# EAGLE board ESP32 alcohol dispenser board (EAGLE 9.6.2)
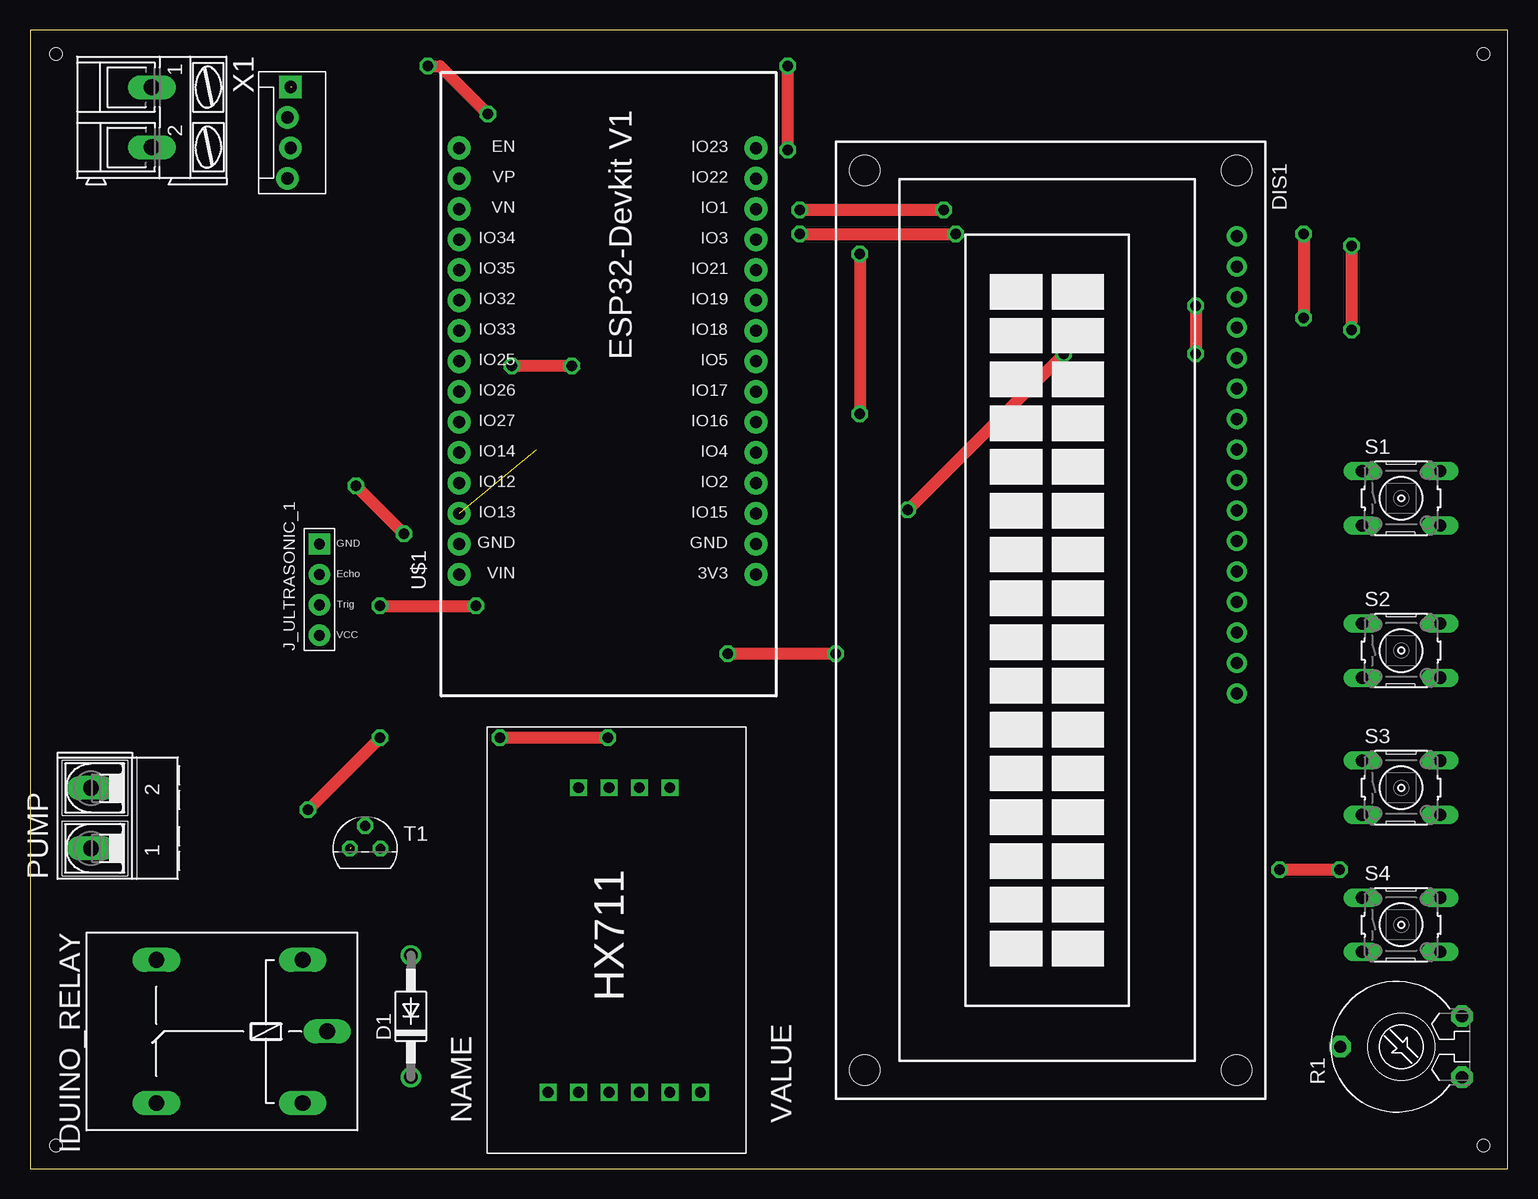
[diagram p0: board, top side]
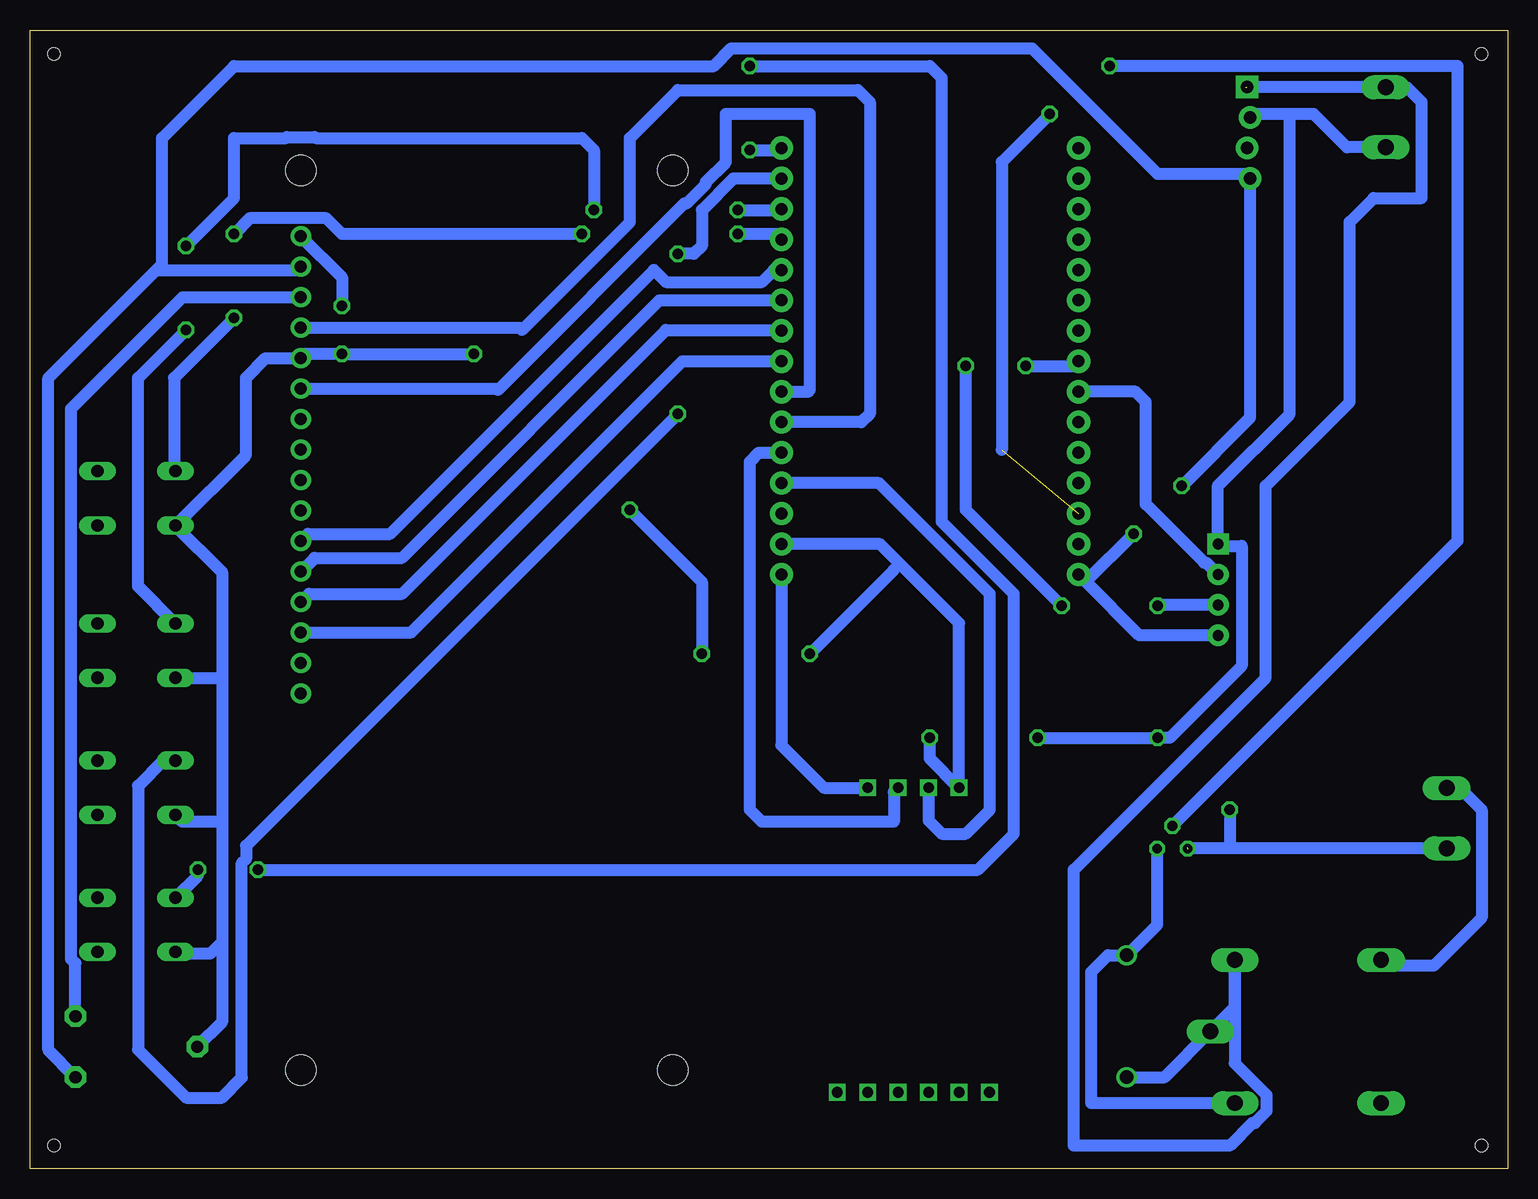
[diagram p1: board, bottom side, seen from below]

Size 123.17 x 94.92 mm. Coordinates in mm from the lower left corner, seen from the top.
Outline: 0,0 123.17,0 123.17,94.92 0,94.92 0,0
Copper layers (1*16): Top 0.035mm / dielectric 1.5mm / Bottom 0.035mm
Design rules "default": minimum track width 6mil, minimum drill 0.35mm, track to track 6mil, track to pad 6mil, pad to pad 6mil, via to via 6mil, smd to smd 6mil, copper to edge 40mil, drill to drill 6mil, minimum pad ring 10mil, minimum via ring 8mil, stop-mask expansion 4mil, vias tented up to drill 0mil, thermal gap 10mil
Holes 1 mm at 2.17,92.92 121.17,92.92 121.17,1.92 2.17,1.92

## Footprints (pad centres in the part's own frame; a part is rotated, then mirrored left to right if it is on the bottom)
DO41-10 = drill 1.118: A 5.08,0; C -5.08,0
TUXGR_16X2_R2 = drill 1 pad 1.676: 1 -32,15.5; 2 -29.46,15.5; 3 -26.92,15.5; 4 -24.38,15.5; 5 -21.84,15.5; 6 -19.3,15.5; 7 -16.76,15.5; 8 -14.22,15.5; 9 -11.68,15.5; 10 -9.14,15.5; 11 -6.6,15.5; 12 -4.06,15.5; 13 -1.52,15.5; 14 1.02,15.5; 15 3.56,15.5; 16 6.1,15.5 | hole 2.5: -37.5,-15.5; 37.5,-15.5; -37.5,15.5; 37.5,15.5
G5LE = drill 1.321 long: 1 -7.493,-5.969; 2 -7.493,5.969; O 4.699,5.969; P -9.525,0; S 4.699,-5.969
HC-SR04_FOOTPRINT = drill 0.9 pad 1.778: ECHO 0,1.27; TRIG 0,-1.27; VCC 0,-3.81 | drill 0.9 pad 1.778 square: GND 0,3.81
MOLEX-1X4_LOCK = drill 1.016 pad 1.88 square: 1 0,0.127 | drill 1.016 pad 1.88: 2 2.54,-0.127; 3 5.08,0.127; 4 7.62,-0.127
AK500/2-H = drill 1.321 long: 1 -2.515,0; 2 2.515,0
PT-10 = drill 1.016 pad 1.778 octagon: 1 -2.54,-5.08; 2 2.54,-5.08; 3 0,5.08
B3F-10XX = drill 1.016 long: 1 -3.251,2.261; 2 3.251,2.261; 3 -3.251,-2.261; 4 3.251,-2.261
TO92 = drill 0.813 octagon: 1 1.27,0; 2 0,1.905; 3 -1.27,0
ESP32-DEVKITV1 = drill 1 pad 1.93: 1 -22.87,-13.54; 2 -20.33,-13.54; 3 -17.79,-13.54; 4 -15.25,-13.54; 5 -12.71,-13.54; 6 -10.17,-13.54; 7 -7.63,-13.54; 8 -5.09,-13.54; 9 -2.55,-13.54; 10 -0.01,-13.54; 11 2.53,-13.54; 12 5.07,-13.54; 13 7.61,-13.54; 14 10.15,-13.54; 15 12.69,-13.54; 16 12.69,11.23; 17 10.15,11.23; 18 7.61,11.23; 19 5.07,11.23; 20 2.53,11.23; 21 -0.01,11.23; 22 -2.55,11.23; 23 -5.09,11.23; 24 -7.63,11.23; 25 -10.17,11.23; 26 -12.71,11.23; 27 -15.25,11.23; 28 -17.79,11.23; 29 -20.33,11.23; 30 -22.87,11.23
HX711 = drill 0.9 square: A+ 8.89,21.59; A- 8.89,24.13; B+ 8.89,16.51; B- 8.89,19.05; DT 34.29,24.13; E+ 8.89,29.21; E- 8.89,26.67; GND 34.29,26.67; SCK 34.29,21.59; VCC 34.29,19.05
AK300/2 = drill 1.321 long: 1 -2.515,0; 2 2.489,0

## Placement (x,y rotation side)
D1  1N4004  [DO41-10]  31.75,12.7 90 top
DIS1  TUXGR_16X2_R2  [TUXGR_16X2_R2]  85.09,45.72 270 top
IDUINO_RELAY  G5LE  [G5LE]  15.24,11.43 180 top
J_ULTRASONIC_1  HC-SR04  [HC-SR04_FOOTPRINT]  24.13,48.26 0 top
LM25965  LM2596S_MODULE  [MOLEX-1X4_LOCK]  21.59,90.17 270 top
PUMP  12V  [AK500/2-H]  5.08,29.21 90 top
R1  [PT-10]  114.3,10.16 90 top
S1  [B3F-10XX]  114.3,55.88 0 top
S2  [B3F-10XX]  114.3,43.18 0 top
S3  [B3F-10XX]  114.3,31.75 0 top
S4  [B3F-10XX]  114.3,20.32 0 top
T1  2N4416  [TO92]  27.94,26.67 0 top
U$1  ESP32DEVKITV1  [ESP32-DEVKITV1]  46.99,72.39 90 top
U$3  [HX711]  72.39,-2.54 90 top
X1  [AK300/2]  10.16,87.63 270 top

## Library data of the parts
D1 = diode
DIS1 = display-lcd; OC_FARNELL: unknown; OC_NEWARK: unknown
IDUINO_RELAY = relay; OC_FARNELL: unknown; OC_NEWARK: unknown
J_ULTRASONIC_1 = Ultrasonic Sensor HC-SR04
LM25965 = LM2596S_Module
PUMP X1 = con-ptr500; OC_FARNELL: unknown; OC_NEWARK: unknown
R1 = rcl; SPICEMODEL: POT; SPICEPREFIX: X
S1-S4 = switch-omron; MPN: B3F-1000; OC_FARNELL: 176432; OC_NEWARK: 36M3542
T1 = transistor-neu-to92
U$1 = ESP32-DEVKITV1
U$3 = HX711

## Nets
GND: DIS1.1 DIS1.5 J_ULTRASONIC_1.GND LM25965.2 PUMP.1 R1.3 S1.3 S2.3 S3.3 S4.3 T1.3 U$1.2 U$3.GND X1.2
N$1: DIS1.6 U$1.7
N$2: T1.2 U$1.28
N$3: U$1.1 U$3.VCC
N$4: U$1.4 U$3.DT
N$5: U$1.5 U$3.SCK
N$6: J_ULTRASONIC_1.ECHO U$1.24
N$7: J_ULTRASONIC_1.TRIG U$1.23
N$8: S4.1 U$1.15
N$9: S3.1 U$1.14
N$10: S2.1 U$1.13
N$11: S1.1 U$1.12
N$12: D1.A IDUINO_RELAY.2 T1.1
N$13: DIS1.11 U$1.11
N$14: DIS1.12 U$1.10
N$15: DIS1.13 U$1.9
N$16: DIS1.14 U$1.8
N$17: DIS1.2 J_ULTRASONIC_1.VCC LM25965.4 R1.1 U$1.30
N$18: DIS1.4 U$1.6
N$19: D1.C IDUINO_RELAY.1 IDUINO_RELAY.P LM25965.1 X1.1
N$20: DIS1.3 R1.2
PUMP_12V: IDUINO_RELAY.S PUMP.2

## Tracks (layer width: path | path; a pad name or v marks a point on that pad's centre or on a via)
GND  (via drill 0.9 pad 1.3)  (1 unrouted)
  Top 0.152: 29.01,36.37 v29.17,35.92
  Top 1.016: v97.17,71.92 v97.17,67.92 | v86.17,67.92 v73.17,54.92 | v67.17,42.92 v58.17,42.92 | v48.17,35.92 v39.17,35.92 | v29.17,35.92 v23.17,29.92
  Bottom 0.152: 26.72,26.77 26.65,26.7 | 50.49,50.24 50.8,49.94 51.17,49.92
  Bottom 1.016: X1.2 13.39,85.14 16.17,87.92 18.17,87.92 | 18.17,87.92 21.17,87.92 LM25965.2 | 18.17,87.92 18.17,62.92 24.13,56.96 J_ULTRASONIC_1.GND 23.98,51.92 22.17,51.92 22.17,41.92 28.17,35.92 v29.17,35.92 v39.17,35.92 | PUMP.1 23.17,26.7 | 23.17,26.7 26.65,26.7 | U$1.2 52.31,52.06 50.49,50.24 45.72,45.47 U$3.GND 48.17,34.2 v48.17,35.92 | DIS1.1 97.17,74.3 v97.17,71.92 | 107.17,40.92 107.17,49.74 S1.3 105.17,59.5 105.17,65.92 103.53,67.56 DIS1.5 100.23,67.92 v97.17,67.92 v86.17,67.92 | S2.3 107.17,40.92 | 107.17,40.92 107.17,28.92 | 107.17,28.92 110.48,28.92 S3.3 | 107.17,28.92 107.17,18.92 | 107.17,18.92 108.17,17.92 110.91,17.92 S4.3 | 107.17,18.92 107.17,12.21 R1.3 | v73.17,54.92 67.17,48.92 v67.17,42.92 | v58.17,42.92 51.17,49.92 | v23.17,29.92 23.17,26.7
  other vias: 100.59,67.56
N$1
  Bottom 1.016: DIS1.6 84.27,65.02 84.17,64.92 68.64,80.45 68.44,80.45 66.82,82.07 66.82,82.27 65.17,83.92 65.17,87.92 58.17,87.92 58.17,64.92 58.33,64.76 U$1.7
N$2  (via drill 0.9 pad 1.3)  (1 unrouted)
  Top 1.016: v33.17,91.92 34.17,91.92 v38.17,87.92
  Bottom 1.016: T1.2 4.17,52.34 4.17,91.92 v33.17,91.92 | v38.17,87.92 42.17,83.92 42.17,59.92
N$3
  Bottom 1.016: U$1.1 60.53,35.28 57,31.75 U$3.VCC
N$4
  Bottom 1.016: U$3.DT 48.26,29.01 47.17,27.92 45.17,27.92 43.17,29.92 43.17,47.92 52.39,57.14 U$1.4
N$5
  Bottom 1.016: U$3.SCK 51.17,31.38 51.17,28.92 62.17,28.92 63.17,29.92 63.17,58.92 62.41,59.68 U$1.5
N$6
  Bottom 1.016: J_ULTRASONIC_1.ECHO 25.12,50.52 25.29,50.52 30.17,55.4 30.17,63.92 31.01,64.76 U$1.24
N$7  (via drill 0.9 pad 1.3)
  Top 1.016: v29.17,46.92 v37.17,46.92 | v45.17,66.92 v40.17,66.92
  Bottom 1.016: J_ULTRASONIC_1.TRIG 29.1,46.99 v29.17,46.92 | v37.17,46.92 45.17,54.92 v45.17,66.92 | v40.17,66.92 36.14,66.92 U$1.23
N$8  (via drill 0.9 pad 1.3)
  Top 1.016: v109.17,24.92 v104.17,24.92 | v63.17,84.92 v63.17,91.92
  Bottom 1.016: S4.1 109.17,24.46 v109.17,24.92 | v104.17,24.92 44.17,24.92 41.17,27.92 41.17,47.92 47.17,53.92 47.17,90.92 48.17,91.92 v63.17,91.92 | v63.17,84.92 60.69,84.92 U$1.15
N$9  (via drill 0.9 pad 1.3)
  Top 1.016: v69.17,76.25 v69.17,62.92
  Bottom 1.016: S3.1 112.08,34.01 114.17,31.92 114.17,9.92 110.17,5.92 107.17,5.92 105.51,7.58 105.51,25.47 105.17,25.81 105.17,26.92 v69.17,62.92 | U$1.14 64.55,82.54 67.17,79.92 67.17,76.92 67.84,76.25 v69.17,76.25
N$10  (via drill 0.9 pad 1.3)
  Top 1.016: v110.17,69.92 v110.17,76.92 | v76.17,79.92 v64.17,79.92
  Bottom 1.016: S2.1 114.17,48.56 114.17,65.92 v110.17,69.92 | v110.17,76.92 106.17,80.92 106.17,85.92 101.81,85.92 101.74,85.99 99.44,85.99 99.37,85.92 77.17,85.92 76.17,84.92 v76.17,79.92 | v64.17,79.92 60.61,79.92 U$1.13
N$11  (via drill 0.9 pad 1.3)
  Top 1.016: v64.17,77.92 v77.17,77.92 | v106.17,77.92 v106.17,70.92
  Bottom 0.152: S1.1 111.15,58.17 111.17,58.17
  Bottom 1.016: U$1.12 60.99,77.92 v64.17,77.92 | v77.17,77.92 97.17,77.92 98.47,79.22 104.87,79.22 v106.17,77.92 | v106.17,70.92 111.17,65.92 111.17,58.17 111.17,57.92
N$12
  Bottom 1.016: IDUINO_RELAY.2 34.71,5.46 34.71,16.38 33.31,17.78 D1.A 29.21,20.32 T1.1
N$13
  Bottom 1.016: DIS1.11 99.99,52.92 93.17,52.92 71.17,74.92 70.17,73.92 62.17,73.92 61.17,74.92 U$1.11
N$14
  Bottom 1.016: DIS1.12 99.45,50.92 92.17,50.92 70.71,72.38 U$1.10
N$15
  Bottom 1.016: DIS1.13 99.91,47.92 92.17,47.92 70.17,69.92 60.61,69.92 U$1.9
N$16
  Bottom 1.016: DIS1.14 91.39,44.7 68.79,67.3 U$1.8
N$17  (via drill 0.9 pad 1.3)
  Top 1.016: v27.17,56.92 v31.17,52.92
  Bottom 1.016: J_ULTRASONIC_1.VCC 30.69,44.45 35.17,48.93 | 35.17,48.93 U$1.30 | 112.65,74.92 121.65,65.92 121.65,9.89 R1.1 | DIS1.2 100.85,74.92 112.65,74.92 | v27.17,56.92 21.46,62.63 LM25965.4 21.83,82.92 29.17,82.92 39.65,93.4 64.69,93.4 66.17,91.92 106.17,91.92 112.17,85.92 112.17,75.4 112.65,74.92 | v31.17,52.92 35.17,48.93
N$18
  Bottom 1.016: DIS1.4 82.35,70.1 82.17,69.92 73.17,78.92 73.17,85.92 69.17,89.92 54.17,89.92 53.17,88.92 53.17,62.92 53.87,62.22 U$1.6
N$19  (1 unrouted)
  Bottom 0.152: 21.84,90.17 21.84,90.14
  Bottom 1.016: 22.17,89.92 21.95,90.14 21.84,90.14 X1.1 8.4,90.14 7.17,88.92 7.17,80.92 11.17,80.92 13.17,78.92 13.17,63.92 20.17,56.92 20.17,40.92 36.17,24.92 36.17,1.92 23.17,1.92 21.28,3.81 21.06,3.81 20.09,4.78 20.09,6.14 22.73,8.79 IDUINO_RELAY.1 22.73,13.46 IDUINO_RELAY.P 28.58,7.62 D1.C
N$20
  Bottom 1.016: R1.2 119.38,17.12 119.74,17.47 119.74,63.35 110.45,72.64 DIS1.3
PUMP_12V
  Bottom 1.016: PUMP.2 3.98,31.73 2.17,29.92 2.17,20.92 6.17,16.92 11.17,16.92 10.69,17.4 IDUINO_RELAY.S